# EAGLE board Schema_placa (EAGLE 9.7.0)
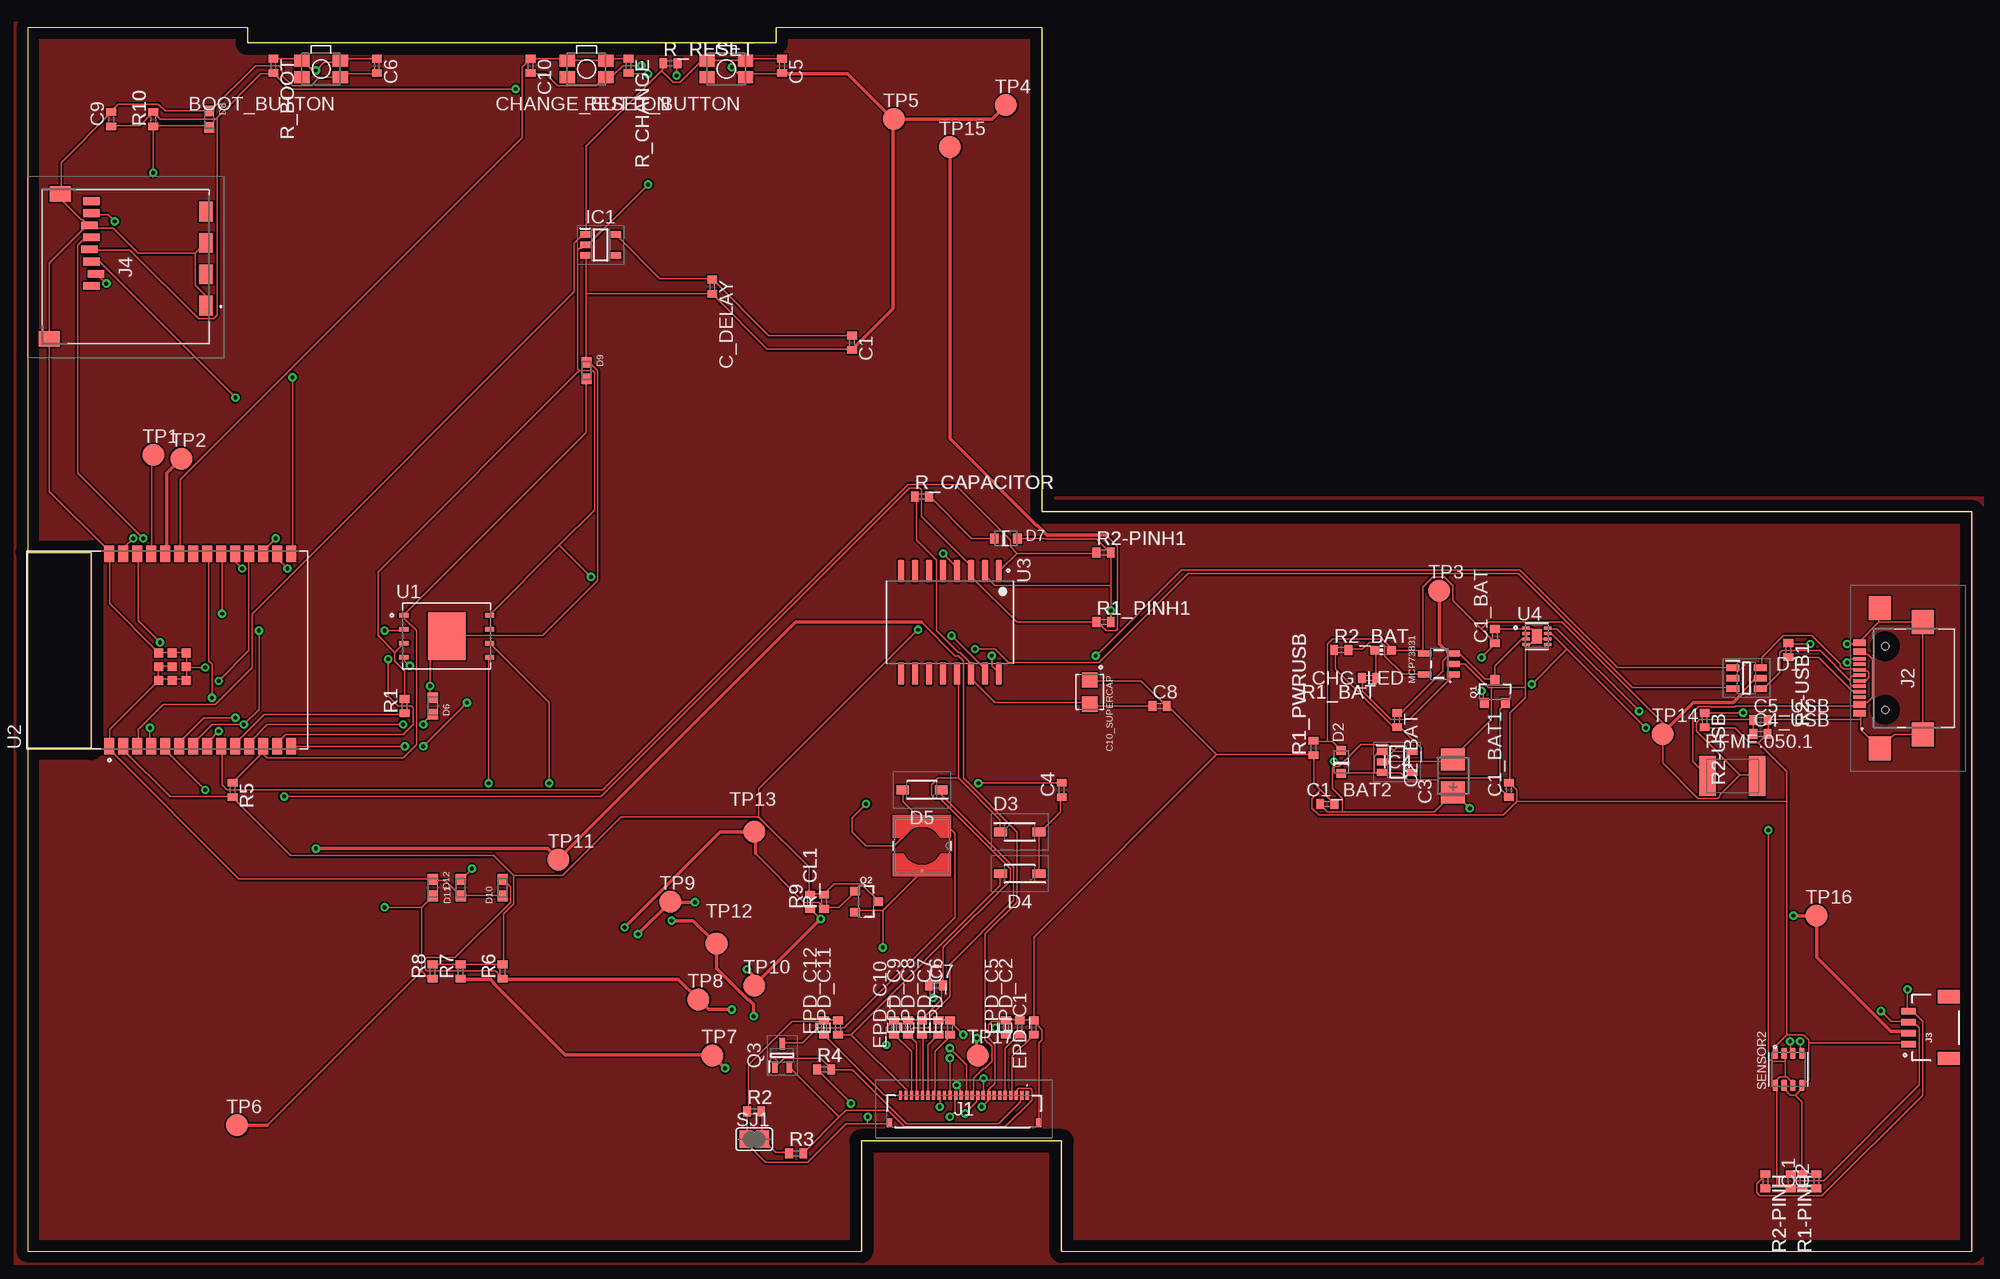
[diagram p0: board, top side]
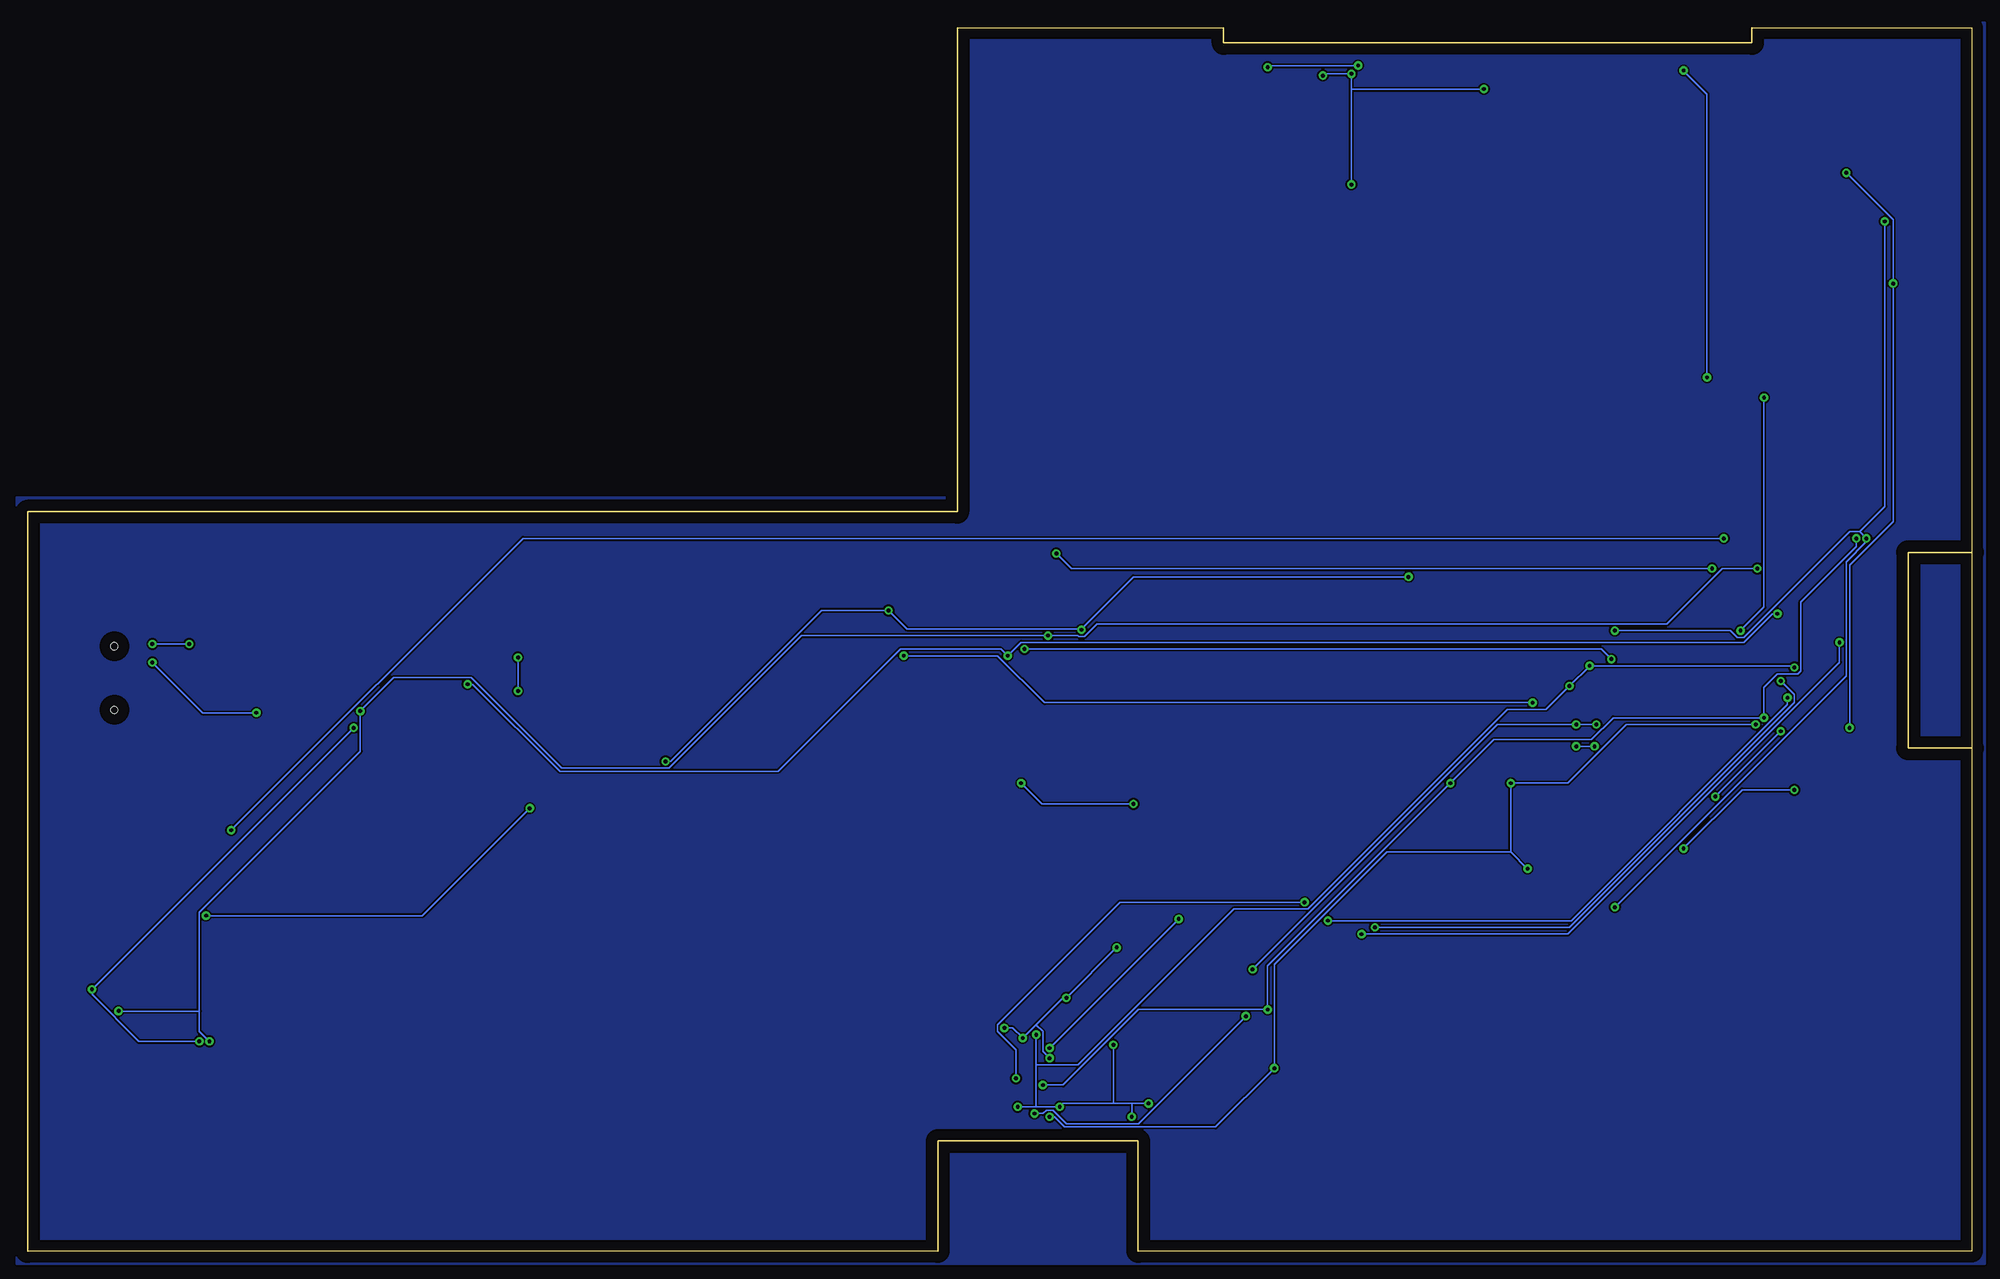
[diagram p1: board, bottom side, seen from below]

Size 176.7 x 111.2 mm. Coordinates in mm from the lower left corner, seen from the top.
Outline: 0,63.5 0,111.2 20,111.2 20,109.8 68,109.8 68,111.2 92.2,111.2 92.2,67.2 176.7,67.2 176.7,0 93.98,0 93.98,10 75.78,10 75.78,0 0,0 0,45.72
Outline: 0,63.5 0,45.72
Outline: 0,63.5 5.81,63.5 5.81,45.72 0,45.72
Copper layers (1*16): Top 0.035mm / dielectric 1.5mm / Bottom 0.035mm
Design rules "Fusion Electronics Design Rules": minimum track width 6mil, minimum drill 0.35mm, track to track 6mil, track to pad 6mil, pad to pad 6mil, via to via 6mil, smd to smd 6mil, copper to edge 40mil, drill to drill 6mil, minimum pad ring 10mil, minimum via ring 8mil, stop-mask expansion 4mil, vias tented up to drill 0mil, thermal gap 10mil

## Footprints (pad centres in the part's own frame; a part is rotated, then mirrored left to right if it is on the bottom)
MYBUTTON = smd 1.4 x 1.05: 1 1.75,0.75; 2 -1.75,0.75; 3 -1.75,-0.75; 4 1.75,-0.75
ESP32_WROVER_EAGLE-LTSPICE_C0402 = smd 0.7 x 0.9: 1 -0.65,0; 2 0.65,0
RCL_CT3528 = smd 2 x 2.2: + -1.5,0; - 1.5,0
CAPCP3225X100N = smd 1.4 x 1.4: 1 -1.1,0; 2 1.1,0
ADAFRUIT_CHIP-LED0603 = smd 0.8 x 0.8: A 0,-0.75; C 0,0.75
SOT95P280X145-6N = smd 1.2 x 0.6: 1 -1.25,0.95; 2 -1.25,0; 3 -1.25,-0.95; 4 1.25,-0.95; 5 1.25,0; 6 1.25,0.95
ESP32_WROVER_AVX---SD0805S020S1R0_AVX_SD0805S020S1R0_0 = smd 0.8 x 0.9: 1 -1.05,0; 2 1.05,0
SOD3716X135N = smd 1.15 x 0.8: 1 -1.75,0; 2 1.75,0
DIOC1608X36N = smd 0.97 x 0.94: 1 -0.75,0; 2 0.75,0
SOT95P280X125-5N = smd 0.9 x 0.6: 1 -1.4,0.95; 2 -1.4,0; 3 -1.4,-0.95; 4 1.4,-0.95; 5 1.4,0.95
SOT95P280X120-5N = smd 0.9 x 0.6: 1 -1.4,0.95; 2 -1.4,0; 3 -1.4,-0.95; 4 1.4,-0.95; 5 1.4,0.95
FH34SRJ24S05SH99 = smd 0.3 x 0.8: 1 5.75,1.45; 2 5.25,1.45; 3 4.75,1.45; 4 4.25,1.45; 5 3.75,1.45; 6 3.25,1.45; 7 2.75,1.45; 8 2.25,1.45; 9 1.75,1.45; 10 1.25,1.45; 11 0.75,1.45; 12 0.25,1.45; 13 -0.25,1.45; 14 -0.75,1.45; 15 -1.25,1.45; 16 -1.75,1.45; 17 -2.25,1.45; 18 -2.75,1.45; 19 -3.25,1.45; 20 -3.75,1.45; 21 -4.25,1.45; 22 -4.75,1.45; 23 -5.25,1.45; 24 -5.75,1.45 | smd 0.4 x 0.8: MP1 6.75,-1.05; MP2 -6.75,-1.05
SAMACSYS_PARTS_USB4110GFA = smd 0.3 x 1.15: A1 -3.35,4.948; A4 -2.55,4.948; A5 -1.25,4.948; A6 -0.25,4.948; A7 0.25,4.948; A8 1.25,4.948; A9 2.55,4.948; A12 3.35,4.948; B1 3.05,4.948; B4 2.25,4.948; B5 1.75,4.948; B6 0.75,4.948; B7 -0.75,4.948; B8 -1.75,4.948; B9 -2.25,4.948; B12 -3.05,4.948 | smd 2.18 x 2: MP1 -5.11,-0.827; MP2 5.11,-0.827; MP3 -6.38,3.103; MP4 6.38,3.103 | hole 0.65: -2.89,2.603; 2.89,2.603
JST04_1MM_RA = smd 0.6 x 1.35: 1 -1.5,0; 2 -0.5,0; 3 0.5,0; 4 1.5,0 | smd 1.2 x 2: NC1 2.8,-3.675; NC2 -2.8,-3.675
112ATAARR03ATTEND = smd 1.8 x 1.2: G1 10.6,10.4; G2 4.9,10.4; S1 7.75,10.4; S2 2.05,10.4 | smd 1.4 x 1.9: G3 13.6,-3.85; G4 0.45,-2.85 | smd 0.7 x 1.5: P1 8.8,0; P2 7.7,0.4; P3 6.6,0; P4 5.5,-0.2; P5 4.4,0; P6 3.3,-0.2; P7 2.2,0; P8 1.1,0
IND_4828-WE-TPC_WRE = smd 0.254 x 0.254: 1 -2.286,0; 2 2.286,0
ESP32_WROVER_SPARKFUN-IC-POWER_SOT23-5 = smd 0.55 x 1.2: 1 -0.95,-1.3; 2 0,-1.3; 3 0.95,-1.3; 4 0.95,1.3; 5 -0.95,1.3
ESP32C6_VARISTOR_CT/CN1812 = smd 1.5 x 3.6: 1 -2.25,0; 2 2.25,0
ESP32_WROVER_SPARKFUN-DISCRETESEMI_SOT23-3 = smd 0.8 x 0.9: 1 -0.95,-1; 2 0.95,-1; 3 0,1.1
SOT65P210X110-3N = smd 1.05 x 0.5: 1 -1.05,0.65; 2 -1.05,-0.65; 3 1.05,0
ESP32_WROVER_EAGLE-LTSPICE_R0402 = smd 0.7 x 0.9: 1 -0.65,0; 2 0.65,0
ESP32_WROVER_BME680_PSON80P300X300X100-8N = smd 1.016 x 0.5: 1 1.458,1.2; 2 1.458,0.4; 3 1.458,-0.4; 4 1.458,-1.2; 5 -1.458,-1.22; 6 -1.458,-0.4; 7 -1.458,0.4; 8 -1.458,1.2
SJ = smd 1.168 x 1.6: 1 -0.762,0; 2 0.762,0
TP20R = smd 2 x 2: TP 0,0
SON127P600X800X80-9N = smd 0.94 x 0.44: 1 -3.895,1.905; 2 -3.895,0.635; 3 -3.895,-0.635; 4 -3.895,-1.905; 5 3.895,-1.905; 6 3.895,-0.635; 7 3.895,0.635; 8 3.895,1.905 | smd 3.4 x 4.3: 9 0,0
XCVR_ESP32-C6-WROOM-1-N8 = smd 1.5 x 0.9: 1 -8.75,5.26; 2 -8.75,3.99; 3 -8.75,2.72; 4 -8.75,1.45; 5 -8.75,0.18; 6 -8.75,-1.09; 7 -8.75,-2.36; 8 -8.75,-3.63; 9 -8.75,-4.9; 10 -8.75,-6.17; 11 -8.75,-7.44; 12 -8.75,-8.71; 13 -8.75,-9.98; 14 -8.75,-11.25; 15 8.75,-11.25; 16 8.75,-9.98; 17 8.75,-8.71; 18 8.75,-7.44; 19 8.75,-6.17; 20 8.75,-4.9; 21 8.75,-3.63; 22 8.75,-2.36; 23 8.75,-1.09; 24 8.75,0.18; 25 8.75,1.45; 26 8.75,2.72; 27 8.75,3.99; 28 8.75,5.26 | smd 0.8 x 0.8: 29_1 -2.755,0.79; 29_2 -1.505,0.79; 29_3 -0.255,0.79; 29_4 -2.755,-0.46; 29_5 -1.505,-0.46; 29_6 -0.255,-0.46; 29_7 -2.755,-1.71; 29_8 -1.505,-1.71; 29_9 -0.255,-1.71
SOIC127P1032X265-16N = smd 2.05 x 0.59: 1 -4.655,4.445; 2 -4.655,3.175; 3 -4.655,1.905; 4 -4.655,0.635; 5 -4.655,-0.635; 6 -4.655,-1.905; 7 -4.655,-3.175; 8 -4.655,-4.445; 9 4.655,-4.445; 10 4.655,-3.175; 11 4.655,-1.905; 12 4.655,-0.635; 13 4.655,0.635; 14 4.655,1.905; 15 4.655,3.175; 16 4.655,4.445
SON50P200X200X80-9N = smd 0.76 x 0.27: 1 -0.985,0.75; 2 -0.985,0.25; 3 -0.985,-0.25; 4 -0.985,-0.75; 5 0.985,-0.75; 6 0.985,-0.25; 7 0.985,0.25; 8 0.985,0.75 | smd 0.9 x 1.3: 9 0,0

## Placement (x,y rotation side)
BOOT_BUTTON  BUTTON_CUSYOMV1  [MYBUTTON]  26.67,107.43 180 top
C1  [ESP32_WROVER_EAGLE-LTSPICE_C0402]  74.93,82.55 270 top
C1_BAT  4.7uF  [ESP32_WROVER_EAGLE-LTSPICE_C0402]  133.35,55.88 90 top
C1_BAT1  4.7uF  [ESP32_WROVER_EAGLE-LTSPICE_C0402]  134.62,41.91 90 top
C1_BAT2  4.7uF  [ESP32_WROVER_EAGLE-LTSPICE_C0402]  118.11,40.64 0 top
C2  100nF  [ESP32_WROVER_EAGLE-LTSPICE_C0402]  162.56,6.35 90 top
C2_BAT  4.7uF  [ESP32_WROVER_EAGLE-LTSPICE_C0402]  124.46,48.26 270 top
C3  100uF TANT  [RCL_CT3528]  129.54,43.18 90 top
C4  4.7uF/25V  [ESP32_WROVER_EAGLE-LTSPICE_C0402]  93.98,41.91 90 top
C4_USB  100nF  [ESP32_WROVER_EAGLE-LTSPICE_C0402]  157.48,46.99 0 top
C5  1uF  [ESP32_WROVER_EAGLE-LTSPICE_C0402]  68.58,107.71 270 top
C5_USB  4.7uF  [ESP32_WROVER_EAGLE-LTSPICE_C0402]  157.48,48.26 0 top
C6  100nF  [ESP32_WROVER_EAGLE-LTSPICE_C0402]  31.75,107.71 270 top
C7  10uF  [ESP32_WROVER_EAGLE-LTSPICE_C0402]  82.55,24.13 0 top
C8  100nF  [ESP32_WROVER_EAGLE-LTSPICE_C0402]  102.87,49.53 0 top
C9  100nF  [ESP32_WROVER_EAGLE-LTSPICE_C0402]  7.62,102.87 90 top
C10  100nF  [ESP32_WROVER_EAGLE-LTSPICE_C0402]  45.72,107.71 270 top
C10_SUPERCAP  CPH3225A  [CAPCP3225X100N]  96.52,50.8 270 top
C.1  100nF  [ESP32_WROVER_EAGLE-LTSPICE_C0402]  161.29,6.35 90 top
C_DELAY  100nF  [ESP32_WROVER_EAGLE-LTSPICE_C0402]  62.23,87.63 270 top
CHANGE_BUTTON  BUTTON_CUSYOMV1  [MYBUTTON]  50.8,107.43 180 top
CHG_LED  [ADAFRUIT_CHIP-LED0603]  123.19,54.61 90 top
D1  USBLC6-2SC6Y  [SOT95P280X145-6N]  156.21,52.07 0 top
D2  ESP32_WROVER_AVX---SD0805S020S1R0_AVX_SD0805S020S1R0_0_0AVX_SD0805S020S1R0_0_0  [ESP32_WROVER_AVX---SD0805S020S1R0_AVX_SD0805S020S1R0_0]  119.38,44.45 90 top
D3  MBR0530  [SOD3716X135N]  90.17,38.1 0 top
D4  MBR0530  [SOD3716X135N]  90.17,34.29 180 top
D5  MBR0530  [SOD3716X135N]  81.28,41.91 180 top
D6  PGB1010603MR  [DIOC1608X36N]  36.83,49.53 270 top
D7  ESP32_WROVER_AVX---SD0805S020S1R0_AVX_SD0805S020S1R0_0_0AVX_SD0805S020S1R0_0_0  [ESP32_WROVER_AVX---SD0805S020S1R0_AVX_SD0805S020S1R0_0]  88.9,64.77 0 top
D8  PGB1010603MR  [DIOC1608X36N]  16.51,102.87 270 top
D9  PGB1010603MR  [DIOC1608X36N]  50.8,80.01 270 top
D10  PGB1010603MR  [DIOC1608X36N]  43.18,33.02 90 top
D11  PGB1010603MR  [DIOC1608X36N]  39.37,33.02 90 top
D12  PGB1010603MR  [DIOC1608X36N]  36.83,33.02 270 top
EPD_C1  1uF/50V  [ESP32_WROVER_EAGLE-LTSPICE_C0402]  91.44,20.32 90 top
EPD_C2  1uF/50V  [ESP32_WROVER_EAGLE-LTSPICE_C0402]  90.17,20.32 90 top
EPD_C5  0.1uF/50V  [ESP32_WROVER_EAGLE-LTSPICE_C0402]  88.9,20.32 90 top
EPD_C6  1uF/50V  [ESP32_WROVER_EAGLE-LTSPICE_C0402]  83.82,20.32 90 top
EPD_C7  1uF/50V  [ESP32_WROVER_EAGLE-LTSPICE_C0402]  82.77,20.32 90 top
EPD_C8  1uF/50V  [ESP32_WROVER_EAGLE-LTSPICE_C0402]  81.28,20.32 90 top
EPD_C9  1uF/50V  [ESP32_WROVER_EAGLE-LTSPICE_C0402]  80.01,20.32 90 top
EPD_C10  1uF/50V  [ESP32_WROVER_EAGLE-LTSPICE_C0402]  78.74,20.32 90 top
EPD_C11  1uF/50V  [ESP32_WROVER_EAGLE-LTSPICE_C0402]  73.66,20.32 90 top
EPD_C12  1uF/50V  [ESP32_WROVER_EAGLE-LTSPICE_C0402]  72.39,20.32 90 top
IC1  BD5229G-TR  [SOT95P280X125-5N]  52.07,91.44 0 top
IC4  XC6220A331MR-G  [SOT95P280X120-5N]  124.46,44.45 0 top
J1  FH34SRJ-24S-0.5SH_99_  [FH34SRJ24S05SH99]  85.09,12.7 0 top
J2  SAMACSYS_PARTS_USB4110-GF-A  [SAMACSYS_PARTS_USB4110GFA]  171.42,52.07 90 top
J3  QWIIC_RIGHT_ANGLE  [JST04_1MM_RA]  170.93,20.32 90 top
J4  112A-TAAR-R03_ATTEND  [112ATAARR03ATTEND]  5.82,96.52 270 top
L1  744043680IND_4828-WE-TPC_WRE  [IND_4828-WE-TPC_WRE]  81.28,36.83 270 top
MCP73831  ESP32_WROVER_SPARKFUN-IC-POWER_MCP73831  [ESP32_WROVER_SPARKFUN-IC-POWER_SOT23-5]  128.27,53.34 90 top
PFMF.050.1  ESP32C6_VARISTORCN1812  [ESP32C6_VARISTOR_CT/CN1812]  154.94,43.18 0 top
Q1  20V/4.2A/52mΩ/1.4W  [ESP32_WROVER_SPARKFUN-DISCRETESEMI_SOT23-3]  133.35,50.8 0 top
Q2  20V/4.2A/52mΩ/1.4W  [ESP32_WROVER_SPARKFUN-DISCRETESEMI_SOT23-3]  76.2,31.75 270 top
Q3  SI1308EDL-T1-GE3  [SOT65P210X110-3N]  68.58,17.78 90 top
R1  10K  [ESP32_WROVER_EAGLE-LTSPICE_R0402]  34.29,49.53 90 top
R1-PINH  10K  [ESP32_WROVER_EAGLE-LTSPICE_R0402]  160.24,6.35 270 top
R1_BAT  200  [ESP32_WROVER_EAGLE-LTSPICE_R0402]  121.92,52.07 180 top
R1_PINH1  10K  [ESP32_WROVER_EAGLE-LTSPICE_R0402]  97.79,57.15 0 top
R1_PWRUSB  100K  [ESP32_WROVER_EAGLE-LTSPICE_R0402]  116.84,45.72 90 top
R2  2.2  [ESP32_WROVER_EAGLE-LTSPICE_R0402]  66.04,12.7 0 top
R2-PINH  10K  [ESP32_WROVER_EAGLE-LTSPICE_R0402]  157.92,6.35 270 top
R2-PINH1  10K  [ESP32_WROVER_EAGLE-LTSPICE_R0402]  97.79,63.5 0 top
R2-USB  5k1  [ESP32_WROVER_EAGLE-LTSPICE_R0402]  152.4,48.26 270 top
R2-USB1  5k1  [ESP32_WROVER_EAGLE-LTSPICE_R0402]  160.02,54.61 270 top
R2_BAT  2K  [ESP32_WROVER_EAGLE-LTSPICE_R0402]  119.38,54.61 0 top
R3  0.47  [ESP32_WROVER_EAGLE-LTSPICE_R0402]  69.85,8.89 0 top
R4  10K  [ESP32_WROVER_EAGLE-LTSPICE_R0402]  72.39,16.51 0 top
R5  10K  [ESP32_WROVER_EAGLE-LTSPICE_R0402]  18.66,41.91 270 top
R6  10K  [ESP32_WROVER_EAGLE-LTSPICE_R0402]  43.18,25.4 90 top
R7  10K  [ESP32_WROVER_EAGLE-LTSPICE_R0402]  39.37,25.4 90 top
R8  10K  [ESP32_WROVER_EAGLE-LTSPICE_R0402]  36.83,25.4 90 top
R9  10K  [ESP32_WROVER_EAGLE-LTSPICE_R0402]  71.12,31.75 90 top
R10  10K  [ESP32_WROVER_EAGLE-LTSPICE_R0402]  11.43,102.87 90 top
R_BOOT  10K  [ESP32_WROVER_EAGLE-LTSPICE_R0402]  22.35,107.71 270 top
R_CAPACITOR  15  [ESP32_WROVER_EAGLE-LTSPICE_R0402]  81.28,68.58 0 top
R_CHANGE  10K  [ESP32_WROVER_EAGLE-LTSPICE_R0402]  54.61,107.71 270 top
R_CL1  10K  [ESP32_WROVER_EAGLE-LTSPICE_R0402]  72.39,31.75 90 top
R_RESET  10K  [ESP32_WROVER_EAGLE-LTSPICE_R0402]  58.42,107.95 0 top
RESET_BUTTON  BUTTON_CUSYOMV1  [MYBUTTON]  63.5,107.43 180 top
SENSOR2  ESP32_WROVER_BME680_BME680  [ESP32_WROVER_BME680_PSON80P300X300X100-8N]  160.02,16.51 90 top
SJ1  [SJ]  66.04,10.16 0 top
TP1  TPTP20R  [TP20R]  11.43,72.35 0 top
TP2  TPTP20R  [TP20R]  13.97,72 0 top
TP3  TPTP20R  [TP20R]  128.27,60.03 0 top
TP4  TPTP20R  [TP20R]  88.9,104.14 0 top
TP5  TPTP20R  [TP20R]  78.74,102.87 0 top
TP6  TPTP20R  [TP20R]  19.05,11.43 0 top
TP7  TPTP20R  [TP20R]  62.23,17.78 0 top
TP8  TPTP20R  [TP20R]  60.96,22.86 0 top
TP9  TPTP20R  [TP20R]  58.42,31.75 0 top
TP10  TPTP20R  [TP20R]  66.04,24.13 0 top
TP11  TPTP20R  [TP20R]  48.26,35.56 0 top
TP12  TPTP20R  [TP20R]  62.62,27.94 0 top
TP13  TPTP20R  [TP20R]  66.04,38.1 0 top
TP14  TPTP20R  [TP20R]  148.59,46.99 0 top
TP15  TPTP20R  [TP20R]  83.82,100.33 0 top
TP16  TPTP20R  [TP20R]  162.56,30.48 0 top
TP17  TPTP20R  [TP20R]  86.36,17.78 0 top
U1  W25Q512JVEIQ  [SON127P600X800X80-9N]  38.1,55.88 0 top
U2  ESP32-C6-WROOM-1-N8  [XCVR_ESP32-C6-WROOM-1-N8]  12.7,54.61 90 top
U3  DS3231SN#  [SOIC127P1032X265-16N]  83.82,57.15 270 top
U4  MAX17048G+T10  [SON50P200X200X80-9N]  137.16,55.88 0 top

## Library data of the parts
BOOT_BUTTON CHANGE_BUTTON CHG_LED PFMF.050.1 RESET_BUTTON SJ1 TP1-TP17 = DeskAssistant v19 v1
C1 C1_BAT C1_BAT1 C1_BAT2 C2 C2_BAT C4 C4_USB C5 C5_USB C6-C10 C.1 C_DELAY EPD_C1 EPD_C2 EPD_C5-EPD_C12 = DeskAssistant v19 v1; SPICEMODEL: NONE; SPICEPREFIX: C
C3 = DeskAssistant v19 v1; SPICEPREFIX: C
C10_SUPERCAP = DeskAssistant v19 v1; AVAILABILITY: Not in stock; CHECK_PRICES: https://www.snapeda.com/parts/CPH3225A/Seiko+Instruments/view-part/?ref=eda; DESCRIPTION: 11 mF (EDLC) Supercapacitor 3.3 V 1210 (3225 Metric) - -; MF: Seiko Instruments; MP: CPH3225A; PACKAGE: 1210 Seiko; PRICE: None; PURCHASE-URL: https://www.snapeda.com/api/url_track_click_mouser/?unipart_id=562593&manufacturer=Seiko Instruments&part_name=CPH3225A&search_term=None; SNAPEDA_LINK: https://www.snapeda.com/parts/CPH3225A/Seiko+Instruments/view-part/?ref=snap
D1 = DeskAssistant v19 v1; AVAILABILITY: In Stock; CHECK_PRICES: https://www.snapeda.com/parts/USBLC6-2SC6Y/STMicroelectronics/view-part/?ref=eda; DESCRIPTION: 17V Clamp 5A (8/20µs) Ipp Tvs Diode Surface Mount SOT-23-6; MF: STMicroelectronics; MP: USBLC6-2SC6Y; PACKAGE: SOT-23-6 STMicroelectronics; PRICE: None; SNAPEDA_LINK: https://www.snapeda.com/parts/USBLC6-2SC6Y/STMicroelectronics/view-part/?ref=snap
D2 D7 = DeskAssistant v19 v1; CENTROID_NOT_SPECIFIED: No; DATASHEET: http://datasheets.avx.com/schottky.pdf; DIGIKEY_DESCRIPTION: DIODE SCHOTTKY 20V 1A 0805; DIGIKEY_PART_NUMBER: 478-7800-1-ND; LEAD_FREE: yes; MF: AVX; MOUSER_PART_NUMBER: 581-SD0805S020S1R0; PACKAGE: 0805 (2012 metric); PREFIX: D; ROHS: yes; TEMPERATURE_RANGE_HIGH: +125°C; TEMPERATURE_RANGE_LOW: -55°C
D3-D5 = DeskAssistant v19 v1; AVAILABILITY: In Stock; CHECK_PRICES: https://www.snapeda.com/parts/MBR0530/Onsemi/view-part/?ref=eda; DESCRIPTION: Diode Schottky 30 V 500mA Surface Mount SOD-123; MF: ON Semiconductor; MP: MBR0530; PACKAGE: SOD-123-2 ON Semiconductor; PRICE: None; PURCHASE-URL: https://www.snapeda.com/api/url_track_click_mouser/?unipart_id=179458&manufacturer=ON Semiconductor&part_name=MBR0530&search_term=None; SNAPEDA_LINK: https://www.snapeda.com/parts/MBR0530/Onsemi/view-part/?ref=snap
D6 D8-D12 = DeskAssistant v19 v1; AVAILABILITY: In Stock; CHECK_PRICES: https://www.snapeda.com/parts/PGB1010603MR/Littelfuse/view-part/?ref=eda; DESCRIPTION: 150V (Typ) Clamp - Ipp Tvs Diode Surface Mount 0603 (1608 Metric); MF: Littelfuse Inc.; MP: PGB1010603MR; PACKAGE: 0603 Littelfuse Inc.; PRICE: None; PURCHASE-URL: https://www.snapeda.com/api/url_track_click_mouser/?unipart_id=5659453&manufacturer=Littelfuse Inc.&part_name=PGB1010603MR&search_term=None; SNAPEDA_LINK: https://www.snapeda.com/parts/PGB1010603MR/Littelfuse/view-part/?ref=snap
IC1 = DeskAssistant v19 v1; DESCRIPTION: Voltage Detector with Adjustable Delay Time: CMOS processes are utilized to develop high precision, low current consumption CMOS reset ICs that allow arbitrary setting of the delay time. The extensive lineup includes both Nch Open Drain and CMOS output types in a wide range of detection voltages (from 2.3V to 6.0V, in 0.1V steps), enabling selection of the ideal solution based on customer requirements. In addition, the entire series is of course both lead-free and RoHS-compliant.; HEIGHT: 1.25mm; MANUFACTURER_NAME: ROHM Semiconductor; MANUFACTURER_PART_NUMBER: BD5229G-TR; MOUSER_PART_NUMBER: 755-BD5229G-TR; MOUSER_PRICE-STOCK: https://www.mouser.co.uk/ProductDetail/ROHM-Semiconductor/BD5229G-TR?qs=4kLU8WoGk0vvnhrrYwdszw%3D%3D
IC4 = DeskAssistant v19 v1; DESCRIPTION: LDO Voltage Regulators; HEIGHT: 1.2mm; MANUFACTURER_NAME: Torex; MANUFACTURER_PART_NUMBER: XC6220A331MR-G; MOUSER_PART_NUMBER: 865-XC6220A331MR-G; MOUSER_PRICE-STOCK: https://www.mouser.co.uk/ProductDetail/Torex-Semiconductor/XC6220A331MR-G?qs=AsjdqWjXhJ8ZSWznL1J0gg%3D%3D
J1 = DeskAssistant v19 v1; DESCRIPTION: 24 Position FFC, FPC Connector Contacts, Top and Bottom 0.020" (0.50mm) Surface Mount, Right Angle; HEIGHT: 1.1mm; MANUFACTURER_NAME: Hirose; MANUFACTURER_PART_NUMBER: FH34SRJ-24S-0.5SH(99); MOUSER_PART_NUMBER: 798-FH34SRJ24S05SH99; MOUSER_PRICE-STOCK: https://www.mouser.co.uk/ProductDetail/Hirose-Connector/FH34SRJ-24S-0.5SH99?qs=vcbW%252B4%252BSTIpKBl5ap9J8Fw%3D%3D
J2 = DeskAssistant v19 v1; DESCRIPTION: CONN USB 2.0 TYPE-C R/A SMT; HEIGHT: 3.26mm; MANUFACTURER_NAME: GCT (GLOBAL CONNECTOR TECHNOLOGY); MANUFACTURER_PART_NUMBER: USB4110-GF-A; MOUSER_PART_NUMBER: 640-USB4110-GF-A; MOUSER_PRICE-STOCK: https://www.mouser.co.uk/ProductDetail/GCT/USB4110-GF-A?qs=KUoIvG%2F9IlYiZvIXQjyJeA%3D%3D
J3 = DeskAssistant v19 v1; PROD_ID: CONN-13694
J4 = DeskAssistant v19 v1; DESCRIPTION: Micro SD Card Socket, Push-Push Type, Top Mount, SMT, H=1.83mm, 10u; HEIGHT: 1.9mm; MANUFACTURER_NAME: ATTEND; MANUFACTURER_PART_NUMBER: 112A-TAAR-R03 ATTEND
L1 = DeskAssistant v19 v1; COPYRIGHT: Copyright (C) 2024 Ultra Librarian. All rights reserved.; MANUFACTURER_PART_NUMBER: 744043680; MFR_NAME: Wurth Electronics
MCP73831 = DeskAssistant v19 v1; PROD_ID: IC-09995
Q1 Q2 = DeskAssistant v19 v1; PROD_ID: TRAN-14388
Q3 = DeskAssistant v19 v1; AVAILABILITY: In Stock; CHECK_PRICES: https://www.snapeda.com/parts/SI1308EDL-T1-GE3/Vishay+Siliconix/view-part/?ref=eda; DESCRIPTION: Si1308EDL-T1-GE3 N-channel MOSFET Transistor, 1.5 A, 30 V, 3-Pin SC-70 | Siliconix / Vishay SI1308EDL-T1-GE3; MF: Vishay Siliconix; MP: SI1308EDL-T1-GE3; PACKAGE: SOT-323 Vishay Semiconductor; PRICE: None; PURCHASE-URL: https://www.snapeda.com/api/url_track_click_mouser/?unipart_id=274603&manufacturer=Vishay Siliconix&part_name=SI1308EDL-T1-GE3&search_term=None; SNAPEDA_LINK: https://www.snapeda.com/parts/SI1308EDL-T1-GE3/Vishay+Siliconix/view-part/?ref=snap
R1 R1-PINH R1_BAT R1_PINH1 R1_PWRUSB R2 R2-PINH R2-PINH1 R2-USB R2-USB1 R2_BAT R3-R10 R_BOOT R_CAPACITOR R_CHANGE R_CL1 R_RESET = DeskAssistant v19 v1; SPICEMODEL: NONE; SPICEPREFIX: R
SENSOR2 = DeskAssistant v19 v1; AVAILABILITY: Unavailable; DESCRIPTION: Integrated Environmental Unit; MF: Bosch Sensortec; MP: BME680; PACKAGE: LGA-8 Bosch Tools; PRICE: None
U1 = DeskAssistant v19 v1; AVAILABILITY: In Stock; CHECK_PRICES: https://www.snapeda.com/parts/W25Q512JVEIQ/Winbond+Electronics/view-part/?ref=eda; DESCRIPTION: FLASH - NOR Memory IC 512Mb (64M x 8) SPI - Quad I/O 133 MHz 8-WSON (8x6); MF: Winbond Electronics; MP: W25Q512JVEIQ; PACKAGE: Package; PRICE: None; SNAPEDA_LINK: https://www.snapeda.com/parts/W25Q512JVEIQ/Winbond+Electronics/view-part/?ref=snap
U2 = DeskAssistant v19 v1; AVAILABILITY: In Stock; CHECK_PRICES: https://www.snapeda.com/parts/ESP32-C6-WROOM-1-N8/Espressif+Systems/view-part/?ref=eda; DESCRIPTION: Multiprotocol Modules ESP32-C6 module, Wi-Fi 6 in 2.4 GHz band, Bluetooth 5, Zigbee 3.0 and Thread. ESP34-WROOM Compatible - ENGINEERING SAMPLE; MF: Espressif Systems; MP: ESP32-C6-WROOM-1-N8; PACKAGE: None; PRICE: None; SNAPEDA_LINK: https://www.snapeda.com/parts/ESP32-C6-WROOM-1-N8/Espressif+Systems/view-part/?ref=snap
U3 = DeskAssistant v19 v1; AVAILABILITY: In Stock; CHECK_PRICES: https://www.snapeda.com/parts/DS3231SN%23/Analog+Devices/view-part/?ref=eda; DESCRIPTION: Extremely Accurate I²C-Integrated RTC/TCXO/Crystal; MF: Analog Devices; MP: DS3231SN#; PACKAGE: SOIC-16 Maxim; PRICE: None; PURCHASE-URL: https://www.snapeda.com/api/url_track_click_mouser/?unipart_id=99048&manufacturer=Analog Devices&part_name=DS3231SN#&search_term=None; SNAPEDA_LINK: https://www.snapeda.com/parts/DS3231SN%23/Analog+Devices/view-part/?ref=snap
U4 = DeskAssistant v19 v1; AVAILABILITY: In Stock; CHECK_PRICES: https://www.snapeda.com/parts/MAX17048G+T10/Analog+Devices/view-part/?ref=eda; DESCRIPTION: 3µA 1-Cell/2-Cell Fuel Gauge with ModelGauge; MF: Analog Devices; MP: MAX17048G+T10; PACKAGE: TDFN-8 Maxim; PRICE: None; PURCHASE-URL: https://www.snapeda.com/api/url_track_click_mouser/?unipart_id=329239&manufacturer=Analog Devices&part_name=MAX17048G+T10&search_term=None; SNAPEDA_LINK: https://www.snapeda.com/parts/MAX17048G+T10/Analog+Devices/view-part/?ref=snap

## Nets
3V3: C1_BAT2.1 C3.+ C9.1 D7.2 IC1.2 IC4.5 J3.2 J4.P4 Q2.3 R1.2 R1_PINH1.2 R2-PINH1.2 R5.2 R6.2 R7.2 R8.2 R9.2 R10.2 R_BOOT.2 R_CHANGE.2 R_CL1.2 R_RESET.2 TP16.TP U1.3 U1.7 U1.8 U2.2 U3.2
32KHZ: R2-PINH1.1 U2.9 U3.1
DN: D1.4 J2.A7 J2.B7
DP: D1.6 J2.A6 J2.B6
EPD_3V3: C7.1 EPD_C5.1 J1.15 J1.16 L1.2 Q2.2 TP17.TP
EPD_3V3_C: Q2.1 R_CL1.1 TP13.TP U2.18
EPD_BUSY: J1.9 TP9.TP U2.26
EPD_CS: D6.2 J1.12 R9.1 TP10.TP U2.11
EPD_DC: J1.11 TP11.TP U2.5
EPD_RST: J1.10 TP12.TP U2.21
FLASH_CS: D9.2 R5.1 U1.1 U2.12
GDR: J1.2 Q3.1 R4.2
GND: BOOT_BUTTON.2 C1.2 C1_BAT1.2 C1_BAT2.2 C1_BAT.2 C2.2 C2_BAT.2 C3.- C4_USB.2 C5.2 C5_USB.2 C6.2 C7.2 C8.2 C9.2 C10.2 C10_SUPERCAP.1 C.1.2 C_DELAY.2 CHANGE_BUTTON.2 D3.1 D6.1 D8.1 D9.1 D10.1 D11.1 D12.1 EPD_C1.2 EPD_C2.2 EPD_C5.2 EPD_C6.2 EPD_C7.2 EPD_C8.2 EPD_C9.2 EPD_C10.2 EPD_C11.2 EPD_C12.2 IC1.3 IC4.2 J1.8 J1.17 J1.MP1 J1.MP2 J2.A1 J2.A12 J2.B1 J2.B12 J2.MP1 J2.MP2 J2.MP3 J2.MP4 J3.1 J4.G1 J4.G2 J4.G3 J4.G4 J4.P6 MCP73831.2 R1_PWRUSB.1 R2-USB1.1 R2-USB.2 R2.1 R2_BAT.1 R4.1 RESET_BUTTON.2 SENSOR2.1 SENSOR2.5 SENSOR2.7 SJ1.1 TP4.TP TP5.TP U1.4 U1.9 U2.1 U2.28 U2.29_1 U2.29_2 U2.29_3 U2.29_4 U2.29_5 U2.29_6 U2.29_7 U2.29_8 U2.29_9 U3.13 U4.1 U4.4 U4.6 U4.9
GPIO8: R1.1 U2.10
I2C_PW: C2.1 C.1.1 R1-PINH.2 R2-PINH.2 SENSOR2.2 SENSOR2.6 SENSOR2.8 U2.17
INT_RTC: R1_PINH1.1 TP15.TP U2.8 U3.3
IO/BOOT: BOOT_BUTTON.3 BOOT_BUTTON.4 C6.1 R_BOOT.1 U2.15
IO/CHANGE: C10.1 CHANGE_BUTTON.3 CHANGE_BUTTON.4 R_CHANGE.1 U2.23
MISO: D12.2 J4.P7 R8.1 TP6.TP U1.2 U2.27
MOSI: D11.2 J1.14 J4.P3 R7.1 TP7.TP U1.5 U2.7
N$1: C1.1 C_DELAY.1 IC1.5
N$2: J2.B5 R2-USB.1
N$3: EPD_C2.1 J1.5
N$4: J2.A5 R2-USB1.2
N$5: CHG_LED.C R1_BAT.1
N$6: C1_BAT1.1 D2.1 IC4.1 IC4.3 Q1.2
N$7: C4.1 D3.2 D4.1
N$8: MCP73831.1 R1_BAT.2
N$9: MCP73831.5 R2_BAT.2
N$10: EPD_C1.1 J1.4
N$11: EPD_C6.1 J1.18
N$13: EPD_C7.1 J1.19
N$14: EPD_C8.1 J1.20
N$15: D1.2
N$17: EPD_C10.1 J1.22
N$19: EPD_C12.1 J1.24
N$23: D7.1 R_CAPACITOR.2
PREVGH: D5.1 EPD_C9.1 J1.21
PREVGL: D4.2 EPD_C11.1 J1.23
RESE: J1.3 Q3.2 R3.2
RESE': R2.2 R3.1 SJ1.2
RESET: C5.1 IC1.1 R_RESET.1 RESET_BUTTON.3 RESET_BUTTON.4 U2.3
RTC_RST: U2.16 U3.4
RX: TP2.TP U2.24
SCK: D10.2 J1.13 J4.P5 R6.1 TP8.TP U1.6 U2.6
SCL: J3.4 R2-PINH.1 SENSOR2.4 U2.20 U3.16 U4.7
SDA: J3.3 R1-PINH.1 SENSOR2.3 U2.19 U3.15 U4.8
SRC: C4.2 D5.2 L1.1 Q3.3
SS_SD: D8.2 J4.P2 R10.1 U2.4
TX: TP1.TP U2.25
USB_D+: D1.1 U2.14
USB_D-: D1.3 U2.13
VBAT: C2_BAT.1 MCP73831.3 Q1.3 TP3.TP U4.2 U4.3
VBUS: C1_BAT.1 C4_USB.1 C5_USB.1 CHG_LED.A D1.5 D2.2 MCP73831.4 PFMF.050.1.2 Q1.1 R1_PWRUSB.2 TP14.TP
VRTC: C8.1 C10_SUPERCAP.2 R_CAPACITOR.1 U3.14
VUSB: J2.A4 J2.A9 J2.B4 J2.B9 PFMF.050.1.1

## Tracks (layer width: path | path; a pad name or v marks a point on that pad's centre or on a via)
3V3  (via drill 0.35)
  Top 0.152: 11.43,103.48 10.21,102.26 7.62,102.26 C9.1 | 17.22,103.02 17.07,102.87 12.04,102.87 11.43,103.48 | 17.22,103.02 21.18,106.98 22.25,106.98 R_BOOT.2 22.4,106.98 23.77,105.61 v44.35,105.61 | 11.43,103.48 R10.2 | 17.22,103.02 17.22,85.04 16.92,84.73 15.54,84.73 9.3,90.98 5.64,90.98 J4.P4 | R1.2 34.29,52.73 33.38,53.65 33.38,54.41 | 33.38,54.41 34.14,55.17 U1.3 | v56.39,106.98 54.71,106.98 R_CHANGE.2 | v58.98,106.83 58.98,107.9 R_RESET.2 | 50.14,80.01 49.99,80.16 49.99,90.98 50.14,91.14 50.29,91.14 50.6,91.44 IC1.2 50.9,91.44 v56.39,96.93 | 50.14,80.01 51.36,80.01 51.51,79.86 51.51,67.36 48.31,64.16 | 48.31,64.16 42.06,57.91 U1.8 42.06,57.76 42.06,56.54 U1.7 | 33.38,54.41 31.85,55.93 31.85,61.72 50.14,80.01 | 72.39,32.46 71.17,32.46 R9.2 71.02,32.46 71.02,34.9 66.45,39.47 | 72.39,32.46 73.3,33.38 75.74,33.38 77.27,31.85 Q2.3 | 72.39,32.46 R_CL1.2 | R8.2 36.88,26.06 39.32,26.06 R7.2 39.47,26.06 43.13,26.06 R6.2 43.28,26.06 43.28,30.63 44.2,31.55 44.2,34.14 | U2.2 8.84,45.72 8.84,45.41 12.95,41.3 18.59,41.3 R5.2 18.75,41.15 23.93,35.97 42.37,35.97 44.2,34.14 | 66.45,39.47 53.95,39.47 48.62,34.14 44.2,34.14 | 170.84,19.96 J3.2 | 162.61,30.48 TP16.TP | 119.48,39.93 127.86,39.93 129.54,41.6 C3.+ 129.54,41.76 v131.06,40.23 | 119.48,39.93 118.11,39.93 117.5,40.54 C1_BAT2.1 | 118.72,44.04 119.18,44.04 121.16,46.02 123.6,46.02 124.21,45.41 125.73,45.41 IC4.5 | 118.72,44.04 118.57,43.89 118.57,42.06 119.48,41.15 119.48,39.93 | 98.45,60.5 98.45,63.4 R2-PINH1.2 98.3,63.55 97.16,64.69 92.5,64.69 92.42,64.77 D7.2 | 98.45,60.5 v98.45,58.22 R1_PINH1.2 | 98.45,60.5 87.94,60.5 87.02,61.42 87.02,61.72 U3.2
  Top 0.152: v118.72,44.5 118.72,44.04 | v51.21,61.27 48.31,64.16 | v80.92,56.47 66.45,41.99 66.45,39.47
  Top 0.305: 170.84,19.96 169.32,19.96 162.61,26.67 162.61,30.48 | v160.48,30.48 TP16.TP
  Bottom 0.152: v58.98,106.83 58.83,106.98 v56.39,106.98 56.39,105.61 | v56.39,96.93 56.39,105.61 | 56.39,105.61 v44.35,105.61 | v118.72,44.5 118.26,44.5 104.55,58.22 v98.45,58.22 96.77,56.54 80.92,56.54 | v160.48,30.48 140.82,30.48 v131.06,40.23 | v51.21,61.27 76.2,61.27 80.92,56.54 | 80.92,56.54 v80.92,56.47
32KHZ
  Top 0.152: 89.92,63.4 97.08,63.4 R2-PINH1.1 | 89.92,63.4 88.39,61.87 U3.1 | 89.92,63.4 89.31,64.01 89.31,64.62 84.28,69.65 80.01,69.65 52.27,41.91 18.14,41.91 17.68,42.37 17.68,45.72 U2.9
DN
  Top 0.152: 165.66,51.82 165.66,52.12 165.81,52.27 166.42,52.27 J2.A7 | 165.66,51.82 165.66,51.51 165.81,51.36 166.42,51.36 J2.B7 | 165.66,51.82 162.92,54.56 159.41,54.56 159.26,54.41 159.26,52.58 157.89,51.21 157.58,51.21 D1.4
DP
  Top 0.152: J2.A6 166.57,51.82 167.03,51.82 167.34,52.12 167.34,52.58 167.18,52.73 166.57,52.73 J2.B6 166.42,52.88 165.05,52.88 164.74,53.19 164.74,53.34 162.15,55.93 159.56,55.93 157.58,53.95 157.58,53.03 D1.6
EPD_3V3  (via drill 0.35)
  Top 0.152: 77.72,30.94 75.29,30.94 Q2.2 | 77.72,30.94 81.23,34.44 L1.2 | 83.82,14.17 83.36,14.17 J1.16 | v82.3,23.01 81.99,23.32 81.99,24.08 C7.1 | 86.26,17.83 TP17.TP | v87.94,20.27 88.39,19.81 88.85,19.81 EPD_C5.1 | v83.82,17.53 83.82,14.17 | 83.82,14.17 J1.15 | v77.72,27.58 77.72,30.94
  Top 0.305: 86.26,17.83 v86.26,19.36
  Bottom 0.152: 85.04,20.57 v86.26,19.36 87.17,20.27 v87.94,20.27 | 85.04,20.57 82.6,23.01 v82.3,23.01 v77.72,27.58 | v83.82,17.53 84.43,18.14 84.43,19.96 85.04,20.57
EPD_3V3_C  (via drill 0.35)
  Top 0.152: 72.39,31.24 73.76,31.24 75.13,32.61 Q2.1 | v17.37,51.82 20.12,54.56 20.12,63.25 U2.18 | 72.39,31.24 71.93,31.7 70.56,31.7 66.14,36.12 | 72.39,31.24 R_CL1.1 | 66.14,38.1 TP13.TP
  Top 0.305: 66.14,38.1 66.14,36.12 | v54.25,29.41 57.12,32.27 57.12,32.29 62.92,38.1 TP13.TP
  Bottom 0.152: v17.37,51.82 16.15,50.6 16.15,49.84 36.58,29.41 v54.25,29.41
EPD_BUSY  (via drill 0.35)
  Top 0.152: v86.87,15.7 86.87,14.17 J1.9 | 58.52,31.7 TP9.TP | v12.04,55.32 10.06,57.3 10.06,63.25 U2.26
  Top 0.305: 58.52,31.7 v60.66,31.7 | TP9.TP v55.47,28.8
  Bottom 0.152: v86.87,15.7 86.87,18.29 88.54,19.96 88.54,20.57 77.42,31.7 v60.66,31.7 | v12.04,55.32 12.04,53.49 36.73,28.8 v55.47,28.8
EPD_CS  (via drill 0.35)
  Top 0.152: v35.97,47.85 35.97,48.01 36.73,48.77 D6.2 | v34.14,47.85 21.79,47.85 20.27,46.33 20.27,45.87 U2.11 | v83.82,18.44 85.34,16.92 85.34,14.17 J1.12 | v72.08,30.18 71.17,31.09 R9.1 | 66.45,24.54 TP10.TP 66.14,24.23
  Top 0.305: v72.08,30.18 66.45,24.54 v65.38,25.6
  Bottom 0.152: v34.14,47.85 v35.97,47.85 43.13,47.85 v65.38,25.6 | v72.08,30.18 v83.82,18.44
EPD_DC  (via drill 0.35)
  Top 0.152: 81.23,57.15 84.28,54.1 84.58,54.1 85.04,53.65 85.04,42.98 89.92,38.1 89.92,31.7 87.02,28.8 87.02,19.2 87.63,18.59 87.63,17.22 87.02,16.61 86.87,16.61 85.95,15.7 85.95,14.17 J1.11 | 48.31,35.66 TP11.TP | v16.15,41.91 12.65,45.41 12.65,45.72 U2.5
  Top 0.305: 81.23,57.15 69.8,57.15 48.31,35.66 | v26.21,36.58 47.24,36.58 TP11.TP
  Bottom 0.152: v16.15,41.91 20.88,41.91 v26.21,36.58
EPD_RST  (via drill 0.35)
  Top 0.152: v85.19,12.5 86.26,13.56 86.26,14.02 J1.10 | 62.64,27.89 TP12.TP 62.48,28.04 | v16.76,50.29 16.76,53.34 16.46,53.65 16.46,63.25 U2.21
  Top 0.305: v65.99,21.34 65.99,22.4 65.57,22.82 65.5,22.82 62.64,25.69 62.64,27.89 | v58.52,30.02 60.5,30.02 62.48,28.04
  Bottom 0.152: v85.19,12.5 84.43,12.5 84.12,12.8 83.52,12.8 82.3,11.58 75.74,11.58 v65.99,21.34 | v16.76,50.29 16.76,49.68 36.42,30.02 v58.52,30.02
FLASH_CS
  Top 0.152: 21.34,45.26 18.75,42.67 R5.1 | 21.34,45.26 21.34,45.72 U2.12 21.34,45.26 | 21.34,45.26 21.79,44.81 34.14,44.81 35.36,46.02 35.36,56.39 34.29,57.45 34.29,57.76 U1.1 34.29,57.91 50.75,74.37 50.75,79.25 D9.2
GDR
  Top 0.152: J1.2 90.22,14.02 90.22,13.56 88.24,11.58 79.86,11.58 74.98,16.46 73.15,16.46 R4.2 73,16.61 72.08,17.53 68.73,17.53 67.97,16.76 Q3.1
GND  (via drill 0.35)
  Top 0.152: EPD_C11.2 73.61,21.03 72.39,21.03 EPD_C12.2 72.39,20.88 69.49,20.88 65.53,16.92 65.53,12.8 R2.1 65.38,12.65 65.38,10.21 SJ1.1 65.38,10.06 65.38,9.75 67.06,8.08 70.87,8.08 74.37,11.58 76.35,11.58 | 76.35,11.58 78.33,11.58 J1.MP2 | J1.MP1 91.9,11.73 91.9,18.9 92.2,19.2 92.2,20.12 91.44,20.88 EPD_C1.2 91.44,21.03 | 91.44,21.03 90.22,21.03 EPD_C2.2 90.07,21.03 89,21.03 EPD_C5.2 88.85,20.88 87.63,20.88 87.33,20.57 87.33,19.36 87.94,18.75 87.94,15.24 87.33,14.63 87.33,14.17 J1.8 87.33,14.02 87.33,13.72 v86.72,13.11 | EPD_C7.2 82.91,21.03 83.82,21.03 EPD_C6.2 83.82,20.88 v85.04,19.66 | v82.91,13.11 82.91,14.02 J1.17 | v74.83,13.41 71.78,16.46 R4.1 | v76.35,12.19 76.35,11.58 | 80.01,21.03 78.79,21.03 EPD_C10.2 78.64,20.88 78.03,20.27 v78.03,18.75 | 80.01,21.03 81.23,21.03 | 80.01,21.03 EPD_C9.2 | 81.23,21.03 83.06,22.86 83.06,24.08 C7.2 83.21,24.23 83.21,27.58 89.31,33.68 89.31,34.75 82.91,41.15 82.45,41.15 82.14,41.45 82.14,42.37 82.75,42.98 84.58,42.98 | 81.23,21.03 EPD_C8.2 | 84.58,42.98 88.39,39.17 88.39,38.1 D3.1 | 84.58,42.98 84.58,52.43 U3.13 | 137.01,55.63 137.16,55.78 U4.9 | 137.01,55.63 136.55,55.17 136.25,55.17 U4.4 136.09,55.02 136.09,51.21 | 137.01,55.63 138.07,55.63 U4.6 | 137.01,55.63 U4.9 | U4.9 137.16,56.08 136.7,56.54 136.25,56.54 U4.1 136.09,56.54 C1_BAT.2 | 136.09,51.21 136.09,50.29 134.72,48.92 134.72,42.67 C1_BAT1.2 134.72,42.52 135.33,41.91 135.33,40.84 | MCP73831.2 130.61,53.34 132.74,51.21 133.04,51.21 | 136.09,51.21 133.04,51.21 | 126.64,44.5 129.39,44.5 129.54,44.65 C3.- 129.54,44.81 133.04,48.31 133.04,51.21 | 126.64,44.5 123.14,44.5 IC4.2
  Top 0.152: 126.64,44.5 126.64,45.72 124.82,47.55 124.51,47.55 C2_BAT.2 124.36,47.7 124.05,47.7 118.87,52.88 118.87,54.56 R2_BAT.1 | 117.5,41.91 118.72,40.69 C1_BAT2.2 | 117.5,41.91 116.89,42.52 116.89,44.96 R1_PWRUSB.1 116.74,45.11 108.05,45.11 | C10_SUPERCAP.1 96.62,51.82 101.19,51.82 103.48,49.53 C8.2 103.63,49.53 108.05,45.11 | 135.33,40.84 134.11,39.62 117.35,39.62 116.74,40.23 116.74,41.15 117.5,41.91 | C2.2 162.46,7.01 161.39,7.01 C.1.2 161.24,7.01 161.24,13.56 160.63,14.17 | 160.63,14.17 160.17,14.17 159.72,14.63 159.72,14.94 SENSOR2.7 | 160.63,14.17 161.39,14.94 SENSOR2.5 161.39,15.09 161.85,15.54 161.85,18.9 | 159.87,19.66 158.95,18.75 158.95,17.98 SENSOR2.1 | 159.87,19.66 161.39,19.66 161.85,19.2 161.85,18.9 | 161.85,18.9 170.84,18.9 J3.1 | v162,55.17 160.02,55.17 R2-USB1.1 | v165.35,55.17 166.42,55.17 J2.B1 166.57,55.17 166.57,55.32 J2.A12 166.57,55.47 168.25,57.15 | 168.25,57.15 168.25,58.37 J2.MP4 | 168.25,57.15 172.21,57.15 | 157.28,46.18 156.51,46.18 155.14,47.55 152.4,47.55 R2-USB.2 | 157.28,46.18 158.04,46.94 C4_USB.2 158.19,47.09 158.19,48.16 C5_USB.2 158.19,48.31 166.57,48.31 | J2.B12 166.57,48.92 166.57,48.77 J2.A1 166.57,48.62 166.57,48.31 | 166.57,48.31 166.57,47.4 168.25,45.72 J2.MP3 168.4,45.72 169.62,46.94 172.21,46.94 J2.MP1 172.21,47.09 172.21,57.15 | 172.21,57.15 J2.MP2 | 159.87,40.84 159.87,43.59 157.28,46.18 | 159.87,40.84 159.87,19.66 | 159.87,40.84 135.33,40.84 | 91.44,21.03 91.44,28.5 108.05,45.11 | C10.2 45.72,106.98 47.09,106.98 48.16,105.92 51.66,105.92 52.43,106.68 CHANGE_BUTTON.2 52.58,106.83 53.19,106.83 54.1,107.75 v55.78,107.75
  Top 0.152: C5.2 68.58,106.98 65.53,106.98 65.38,106.83 RESET_BUTTON.2 65.23,106.83 64.77,106.83 v64.01,107.59 | v34.75,53.19 34.29,53.65 34.29,53.95 U1.4 | D6.1 36.73,50.29 36.58,50.44 v36.58,51.36 36.58,54.25 38.1,55.78 U1.9 38.1,55.93 46.79,55.93 51.82,60.96 51.82,80.01 51.21,80.62 50.9,80.62 D9.1 50.75,80.77 50.75,87.02 | 50.75,87.02 50.75,90.37 IC1.3 | 50.75,87.02 62.18,87.02 C_DELAY.2 62.33,86.87 67.21,81.99 74.83,81.99 C1.2 74.98,81.99 | 78.64,102.87 TP5.TP | 15.24,90.68 15.24,87.78 16.15,86.87 16.15,85.95 J4.G1 | 15.24,90.68 16.15,91.59 J4.G2 | C6.2 31.7,106.98 28.65,106.98 28.5,106.83 BOOT_BUTTON.2 28.35,106.68 26.52,106.68 25.76,105.92 24.08,105.92 23.16,106.83 23.16,107.44 22.86,107.75 20.73,107.75 16.61,103.63 D8.1 16.46,103.63 12.5,103.63 11.89,104.24 8.23,104.24 7.62,103.63 C9.2 7.62,103.48 3.05,98.91 3.05,96.16 J4.G4 3.05,96.01 3.05,95.56 4.88,93.73 5.03,93.73 5.49,93.27 | 5.49,93.27 1.98,89.76 1.98,83.06 J4.G3 1.98,82.91 1.98,69.04 7.32,63.7 7.32,63.4 U2.28 7.47,63.25 7.47,58.83 11.89,54.41 U2.29_3 12.04,54.41 13.11,54.41 U2.29_6 13.26,54.41 14.33,54.41 U2.29_9 14.48,54.25 14.48,53.19 U2.29_8 14.48,53.03 | 5.49,93.27 J4.P6 5.64,93.12 5.79,92.96 7.77,92.96 10.06,90.68 15.24,90.68 | D10.1 43.13,32.31 39.47,32.31 D11.1 39.32,32.31 37.95,33.68 36.88,33.68 D12.1 36.73,33.83 19.2,33.83 7.32,45.72 U2.1 7.47,45.87 7.47,47.4 11.89,51.82 U2.29_1 | 14.48,53.03 14.48,51.97 U2.29_7 14.33,51.97 13.26,51.97 U2.29_4 13.11,51.97 12.04,51.97 U2.29_1 | U2.29_1 11.89,51.97 11.89,53.03 U2.29_2 12.04,53.19 13.11,53.19 U2.29_5 | 14.48,53.03 v16.15,53.03
  Top 0.305: TP5.TP 87.63,102.87 TP4.TP | 68.58,106.98 74.52,106.98 78.64,102.87 78.64,85.65 74.98,81.99
  Bottom 0.152: v86.72,13.11 85.04,13.11 | 85.04,13.11 v82.91,13.11 82.6,13.41 78.03,13.41 | 78.03,13.41 76.35,13.41 | 76.35,13.41 v74.83,13.41 | 85.04,13.11 85.04,16.92 | 85.04,16.92 v85.04,19.66 | 76.35,13.41 v76.35,12.19 | v78.03,18.75 78.03,13.41 | v165.35,55.17 v162,55.17 | v55.78,107.75 63.86,107.75 v64.01,107.59 | v16.15,53.03 16.31,53.19 v34.75,53.19 v36.58,51.36 38.71,49.23 42.22,49.23 60.35,31.09 67.06,31.09 81.23,16.92 85.04,16.92
GPIO8
  Top 0.152: R1.1 34.29,48.77 21.49,48.77 18.9,46.18 18.9,45.87 U2.10
I2C_PW  (via drill 0.35)
  Top 0.152: 158.95,5.79 160.17,5.79 R1-PINH.2 160.32,5.79 161.24,5.79 C.1.1 161.39,5.79 162.46,5.79 C2.1 | 158.95,5.79 158.04,5.79 R2-PINH.2 | 159.72,15.85 159.87,15.85 160.32,15.39 160.32,15.09 SENSOR2.6 | 159.72,15.85 159.26,15.85 158.95,15.54 158.95,15.09 SENSOR2.8 158.95,14.94 158.95,5.79 | 159.72,15.85 159.72,17.22 | 159.72,17.22 159.72,17.83 SENSOR2.2 | v22.55,64.77 21.49,63.7 21.49,63.4 U2.17 | v158.19,38.25 158.19,17.53 158.5,17.22 159.72,17.22
  Bottom 0.152: v22.55,64.77 131.67,64.77 v158.19,38.25
INT_RTC  (via drill 0.35)
  Top 0.152: v17.37,47.24 16.46,46.33 16.46,45.87 U2.8 | v23.32,41.3 52.12,41.3 80.16,69.34 81.08,69.34 81.23,69.19 81.23,66.75 85.65,62.33 85.65,61.87 U3.3 85.8,61.72 85.8,61.27 89.92,57.15 R1_PINH1.1 97.23,57.15 97.99,56.39 98.91,56.39 99.06,56.54 99.06,64.01 97.99,65.08
  Top 0.305: 97.99,65.08 92.66,65.08 91.78,65.95 91.68,65.95 83.82,73.82 TP15.TP
  Bottom 0.152: v23.32,41.3 v17.37,47.24
IO/BOOT  (via drill 0.35)
  Top 0.152: C6.1 31.7,108.36 28.65,108.36 28.5,108.2 BOOT_BUTTON.3 28.35,108.05 26.98,108.05 v26.21,107.29 25.91,107.29 24.99,108.2 BOOT_BUTTON.4 24.84,108.2 24.69,108.36 22.4,108.36 R_BOOT.1 | v24.08,79.4 24.08,63.4 U2.15
  Bottom 0.152: v24.08,79.4 24.08,105.16 v26.21,107.29
IO/CHANGE
  Top 0.152: R_CHANGE.1 54.56,108.36 52.73,108.36 52.58,108.2 CHANGE_BUTTON.3 52.43,108.2 49.07,108.2 CHANGE_BUTTON.4 48.92,108.2 48.77,108.36 C10.1 | C10.1 44.96,107.59 44.96,101.19 13.87,70.1 13.87,63.4 U2.23 | C10.1
MISO  (via drill 0.35)
  Top 0.152: 35.81,25.45 36.42,24.84 36.73,24.84 R8.1 | 35.81,31.24 35.81,25.45 | 35.81,31.24 36.73,32.16 D12.2 | 35.81,25.45 21.79,11.43 | v32.46,56.39 34.14,56.39 U1.2 | v9.6,64.77 8.84,64.01 8.84,63.4 U2.27 | v7.92,93.57 7.32,94.18 5.94,94.18 J4.P7 | v32.46,31.24 35.81,31.24
  Top 0.305: 21.79,11.43 TP6.TP
  Bottom 0.152: v32.46,56.39 21.95,56.39 21.34,55.78 20.73,55.78 11.12,65.38 10.21,65.38 | 10.21,65.38 v9.6,64.77 9.6,64.47 11.43,62.64 11.43,52.27 v32.46,31.24 | v7.92,93.57 7.92,67.67 10.21,65.38
MOSI  (via drill 0.35)
  Top 0.152: v83.82,12.19 84.28,12.65 84.28,14.02 J1.14 | 39.47,24.69 R7.1 | TP7.TP 62.18,17.83 | v41.91,42.52 41.91,53.95 U1.5 | v40.39,34.75 39.47,33.83 D11.2 | U2.7 15.09,45.87 15.09,46.18 16.76,47.85 v19.66,47.85 21.03,49.23 v21.03,56.39 | v18.9,77.57 6.55,89.92 5.94,89.92 J4.P3
  Top 0.305: TP7.TP v63.4,16.61 | 39.47,24.69 42.06,24.69 42.42,24.33 42.42,24.27 48.87,17.83 62.18,17.83
  Bottom 0.152: v83.82,12.19 83.36,12.19 82.45,11.28 68.73,11.28 v63.4,16.61 63.4,26.06 53.19,36.27 41.91,36.27 | 41.91,36.27 v41.91,42.52 36.73,42.52 31.39,47.85 v19.66,47.85 | v40.39,34.75 41.91,36.27 | v18.9,77.57 18.9,58.52 v21.03,56.39
N$1
  Top 0.152: IC1.5 53.49,92.35 57.45,88.39 62.18,88.39 C_DELAY.1 62.33,88.24 67.36,83.21 74.83,83.21 C1.1
N$2  (via drill 0.35)
  Top 0.152: v155.91,48.92 R2-USB.1 | v165.35,53.49 165.66,53.8 166.42,53.8 J2.B5
  Bottom 0.152: v155.91,48.92 160.78,48.92 v165.35,53.49
N$3
  Top 0.152: J1.5 88.85,14.17 88.85,18.44 90.07,19.66 EPD_C2.1
N$4
  Top 0.152: R2-USB1.2 162.76,53.95 165.81,50.9 166.42,50.9 J2.A5
N$5
  Top 0.152: CHG_LED.C 122.53,54.56 122.53,52.12 R1_BAT.1
N$6
  Top 0.152: 122.38,43.43 122.99,43.43 IC4.3 123.14,43.43 124.82,43.43 125.42,42.82 128.17,42.82 128.32,42.98 133.81,42.98 | 122.38,43.43 119.48,43.43 D2.1 | 122.38,43.43 122.38,44.96 122.68,45.26 122.99,45.26 IC4.1 | 133.81,42.98 133.81,49.23 134.26,49.68 Q1.2 | 133.81,42.98 133.81,42.06 134.57,41.3 C1_BAT1.1
N$7
  Top 0.152: C4.1 93.88,41.15 93.88,39.93 92.05,38.1 D3.2 91.9,38.1 91.9,34.29 D4.1
N$8
  Top 0.152: R1_BAT.2 121.31,51.97 121.31,50.9 123.9,48.31 125.58,48.31 129.54,52.27 MCP73831.1
N$9
  Top 0.152: R2_BAT.2 120.09,54.71 121.31,54.71 121.92,55.32 122.99,55.32 123.29,55.02 123.29,54.1 124.97,52.43 126.95,52.43 MCP73831.5
N$10
  Top 0.152: J1.4 89.46,14.17 89.46,17.68 EPD_C1.1
N$11
  Top 0.152: EPD_C6.1 83.82,19.51 82.45,18.14 82.45,14.17 J1.18
N$13
  Top 0.152: J1.19 81.84,14.17 81.84,18.75 82.75,19.66 EPD_C7.1
N$14
  Top 0.152: J1.20 81.38,14.17 81.38,19.66 EPD_C8.1
N$17
  Top 0.152: J1.22 80.31,14.17 80.31,18.14 78.79,19.66 EPD_C10.1
N$19
  Top 0.152: J1.24 79.25,14.17 77.88,14.17 EPD_C12.1
N$23
  Top 0.152: D7.1 85.8,64.77 81.99,68.58 R_CAPACITOR.2
PREVGH
  Top 0.152: J1.21 80.77,14.17 80.77,18.9 EPD_C9.1 80.01,19.81 80.47,20.27 81.84,20.27 81.99,20.42 81.99,21.34 83.82,23.16 83.82,26.06 89.61,31.85 89.61,34.9 83.06,41.45 83.06,41.91 D5.1
PREVGL
  Top 0.152: 74.83,19.66 79.86,14.63 79.86,14.17 J1.23 | 74.83,19.66 73.76,19.66 EPD_C11.1 | 74.83,19.66 88.39,33.22 88.39,34.29 D4.2
RESE
  Top 0.152: 73.76,12.19 70.56,8.99 R3.2 | 73.76,12.19 74.37,12.8 78.18,12.8 79.7,11.28 88.85,11.28 91.29,13.72 91.29,14.63 91.14,14.78 90.07,14.78 89.92,14.63 89.92,14.17 J1.3 | 73.76,12.19 69.34,16.61 Q3.2
RESE'
  Top 0.152: R2.2 66.75,12.65 66.75,10.21 SJ1.2 67.97,8.99 69.19,8.99 R3.1
RESET
  Top 0.152: C5.1 65.53,108.36 65.38,108.2 RESET_BUTTON.3 65.23,108.2 61.87,108.2 RESET_BUTTON.4 61.72,108.05 61.11,108.05 59.28,106.22 58.67,106.22 57.61,107.29 | 57.61,107.29 57.76,107.44 57.76,107.9 R_RESET.1 | 57.61,107.29 50.75,100.43 50.75,92.51 IC1.1 50.6,92.51 49.68,91.59 49.68,87.17 20.42,57.91 20.42,53.03 17.07,49.68 12.34,49.68 10.06,47.4 10.06,45.87 U2.3
RTC_RST  (via drill 0.35)
  Top 0.152: v23.62,62.03 22.71,62.94 22.71,63.25 U2.16 | v83.21,63.4 84.43,62.18 84.43,61.87 U3.4
  Bottom 0.152: v23.62,62.03 81.84,62.03 v83.21,63.4
RX
  Top 0.152: 12.65,63.4 U2.24 | 13.87,71.93 TP2.TP
  Top 0.305: 12.65,63.4 12.65,70.71 13.87,71.93
SCK  (via drill 0.35)
  Top 0.152: v84.43,15.09 84.73,14.78 84.73,14.17 J1.13 | 43.28,24.69 R6.1 43.13,24.84 42.52,25.45 36.27,25.45 36.12,25.6 36.12,26.52 36.27,26.67 38.86,26.67 43.89,31.7 43.89,33.07 43.28,33.68 D10.2 | v47.4,42.52 47.4,49.84 42.06,55.17 U1.6 | v18.9,48.46 16,48.46 13.87,46.33 13.87,45.87 U2.6 | v10.52,64.77 4.57,70.71 4.57,91.44 5.18,92.05 5.79,92.05 J4.P5
  Top 0.305: v64.01,21.95 61.87,21.95 TP8.TP 59.13,24.69 43.28,24.69
  Bottom 0.152: v84.43,15.09 82.6,15.09 75.74,21.95 v64.01,21.95 64.01,25.91 v47.4,42.52 43.43,46.48 34.59,46.48 32.61,48.46 v18.9,48.46 18.9,51.21 17.68,52.43 15.85,52.43 15.54,52.73 15.54,58.98 10.52,64.01 v10.52,64.77
SCL  (via drill 0.35)
  Top 0.152: v147.07,47.55 139.9,54.71 | 139.9,54.71 138.53,56.08 138.23,56.08 U4.7 | v170.84,23.77 170.84,21.95 J3.4 170.99,21.79 171.3,21.79 172.21,20.88 172.21,14.17 163.07,5.03 157.43,5.03 157.12,5.33 157.12,6.1 157.89,6.86 R2-PINH.1 | v161.09,19.05 161.09,17.98 SENSOR2.4 | v17.68,57.91 17.68,63.25 U2.20 | v87.63,54.1 87.63,53.19 88.24,52.58 U3.16 | v136.7,51.51 139.9,54.71
  Bottom 0.152: v147.07,47.55 v170.84,23.77 170.84,23.32 166.57,19.05 v161.09,19.05 | v17.68,57.91 18.14,57.91 20.73,55.32 86.41,55.32 v87.63,54.1 88.24,54.71 97.38,54.71 108.51,43.59 128.32,43.59 136.25,51.51 v136.7,51.51
SDA  (via drill 0.35)
  Top 0.152: v19.51,62.03 18.9,62.64 18.9,63.25 U2.19 | v83.97,55.93 86.87,53.03 86.87,52.58 U3.15 | R1-PINH.1 160.32,6.86 160.32,6.71 160.63,6.4 163.22,6.4 171.91,15.09 171.91,20.27 171.45,20.73 170.99,20.73 J3.3 170.84,20.88 169.37,20.88 v168.43,21.82 | v146.46,49.07 138.99,56.54 138.23,56.54 U4.8 | v160.17,19.05 160.17,18.14 160.32,17.98 SENSOR2.3
  Bottom 0.152: v19.51,62.03 22.71,62.03 27.74,57 79.54,57 80.67,55.86 81.18,55.86 81.25,55.93 v83.97,55.93 106.38,55.93 118.42,43.89 128.17,43.89 136.4,52.12 143.41,52.12 v146.46,49.07 146.46,45.41 161.09,30.79 161.09,21.79 | 161.09,21.79 161.09,19.96 v160.17,19.05 | 161.09,21.79 168.4,21.79 v168.43,21.82
SEMN
  pour Top: 67.35,110.43 67.33,110.41 20.3,110.41 20.28,110.43 20.26,110.45 20.24,110.47 20.24,111.68 -1.19,111.68 -1.19,-1.19 177.72,-1.19 177.72,68.5 92.69,68.5 92.67,68.52 92.65,68.54 92.63,68.56 92.63,111.68 67.39,111.68 67.39,110.47 67.37,110.45
SEMNJOS
  pour Bottom: 67.35,110.43 67.33,110.41 20.3,110.41 20.28,110.43 20.26,110.45 20.24,110.47 20.24,111.68 -1.19,111.68 -1.19,-1.19 177.72,-1.19 177.72,68.5 92.69,68.5 92.67,68.52 92.65,68.54 92.63,68.56 92.63,111.68 67.39,111.68 67.39,110.47 67.37,110.45
SRC  (via drill 0.35)
  Top 0.152: v86.41,42.52 93.88,42.52 C4.2 | Q3.3 68.58,18.9 70.41,18.9 71.78,20.27 74.22,20.27 84.28,30.33 84.28,37.95 83.06,39.17 81.38,39.17 L1.1 81.15,39.24 | 81.15,39.24 79.55,40.84 79.55,41.91 D5.2 | v76.2,40.64 74.93,39.37 74.93,38.1 76.2,36.83 78.74,36.83 81.15,39.24
  Bottom 0.152: v86.41,42.52 84.53,40.64 v76.2,40.64
SS_SD  (via drill 0.35)
  Top 0.152: D8.2 16.46,102.26 11.43,102.26 R10.1 v11.43,97.99 | v11.12,47.55 11.12,45.87 U2.4 | v7.16,87.94 6.25,88.85 J4.P2
  Bottom 0.152: v11.12,47.55 11.12,62.33 7.16,66.29 v7.16,87.94 7.16,93.73 v11.43,97.99
TX
  Top 0.152: U2.25 11.28,63.4 11.28,72.08 11.43,72.24 TP1.TP
USB_D+  (via drill 0.35)
  Top 0.152: v97.08,54.1 104.85,61.87 135.64,61.87 144.47,53.03 154.84,53.03 D1.1 | v35.97,45.87 v39.93,49.84 | v34.29,45.87 24.08,45.87 U2.14
  Bottom 0.152: v97.08,54.1 88.54,54.1 84.28,49.84 v39.93,49.84 | v34.29,45.87 v35.97,45.87
USB_D-  (via drill 0.35)
  Top 0.152: v86.11,54.71 87.94,54.71 89.15,53.49 97.38,53.49 105.46,61.57 135.48,61.57 145.85,51.21 154.84,51.21 D1.3 | v32.77,53.8 32.77,50.44 33.68,49.53 34.9,49.53 35.05,49.38 35.05,47.85 34.14,46.94 23.47,46.94 22.71,46.18 22.71,45.87 U2.13
  Bottom 0.152: v86.11,54.71 33.68,54.71 v32.77,53.8
VBAT
  Top 0.152: U4.2 136.25,56.08 136.25,55.63 U4.3 136.09,55.63 135.79,55.63 133.35,53.19 133.35,51.97 | 129.24,54.25 128.63,53.65 128.63,52.73 124.82,48.92 124.51,48.92 C2_BAT.1 | 129.24,54.25 129.54,54.25 MCP73831.3 | 133.35,51.97 132.44,51.97 130.15,54.25 129.69,54.25 MCP73831.3 | 133.35,51.97 Q1.3 | 128.32,59.89 TP3.TP | 129.24,54.25 MCP73831.3
  Top 0.305: 128.32,59.89 128.32,55.17 129.24,54.25
VBUS  (via drill 0.35)
  Top 0.152: C4_USB.1 156.82,47.09 156.82,48.16 C5_USB.1 156.82,48.31 151.94,48.31 151.64,48.01 151.64,47.24 155.6,43.28 | 155.6,43.28 157.12,43.28 PFMF.050.1.2 | 155.91,50.75 155.91,50.9 156.97,51.97 157.43,51.97 D1.5 | 149.05,47.55 148.59,47.09 TP14.TP | 155.6,43.28 153.77,41.45 153.77,41.3 153.62,41.15 151.79,41.15 148.59,44.35 TP14.TP | v132.13,50.9 132.28,50.75 132.28,49.84 Q1.1 | v132.13,53.95 133.35,55.17 C1_BAT.1 133.35,55.32 132.13,56.54 | 118.11,46.33 118.57,46.33 119.33,45.57 D2.2 | 118.11,46.33 116.89,46.33 R1_PWRUSB.2 | 126.8,54.56 124.05,54.56 CHG_LED.A 124.05,54.71 123.14,55.63 118.57,55.63 118.11,55.17 118.11,46.33 | 126.8,54.56 126.95,54.41 MCP73831.4 126.8,54.56 | 132.13,56.54 129.54,59.13 129.54,60.5 128.78,61.27 127.71,61.27 126.8,60.35 126.8,54.56 | 149.05,47.55 139.45,57.15 132.74,57.15 132.13,56.54 | 149.05,47.55 TP14.TP
  Top 0.305: 149.05,47.55 151.37,49.87 153.1,49.87 153.14,49.84 154.99,49.84 155.67,50.52 155.69,50.52 155.91,50.73 155.91,50.75
  Bottom 0.152: v132.13,53.95 v132.13,50.9
VRTC
  Top 0.152: C8.1 96.77,49.53 96.62,49.68 C10_SUPERCAP.2 96.47,49.84 87.94,49.84 85.8,51.97 85.8,52.43 U3.14 85.65,52.58 85.65,53.49 84.73,54.41 84.58,54.41 82.6,56.39 82.6,62.79 80.77,64.62 80.77,68.58 R_CAPACITOR.1
VUSB
  Top 0.152: J2.A9 166.57,54.56 166.57,54.41 J2.B4 166.57,54.25 167.18,54.25 167.64,53.8 167.64,50.29 167.18,49.84 166.57,49.84 J2.B9 166.57,49.68 166.57,49.53 J2.A4 155.22,49.53 155.15,49.45 152.98,49.45 152.94,49.49 151.85,49.49 151.33,48.97 151.33,44.5 152.55,43.28 PFMF.050.1.1